# Altium PCB KUOZHAN.PCBDOC (part 3 of 21)
Units mm, origin at the board's own origin, x right, y up, seen from the top; angles counter-clockwise.
Board outline 165.51 x 116.38 mm, 2 copper layers (Top Layer, Bottom Layer); 171 components, 245 nets, 894 pads, 298 vias.
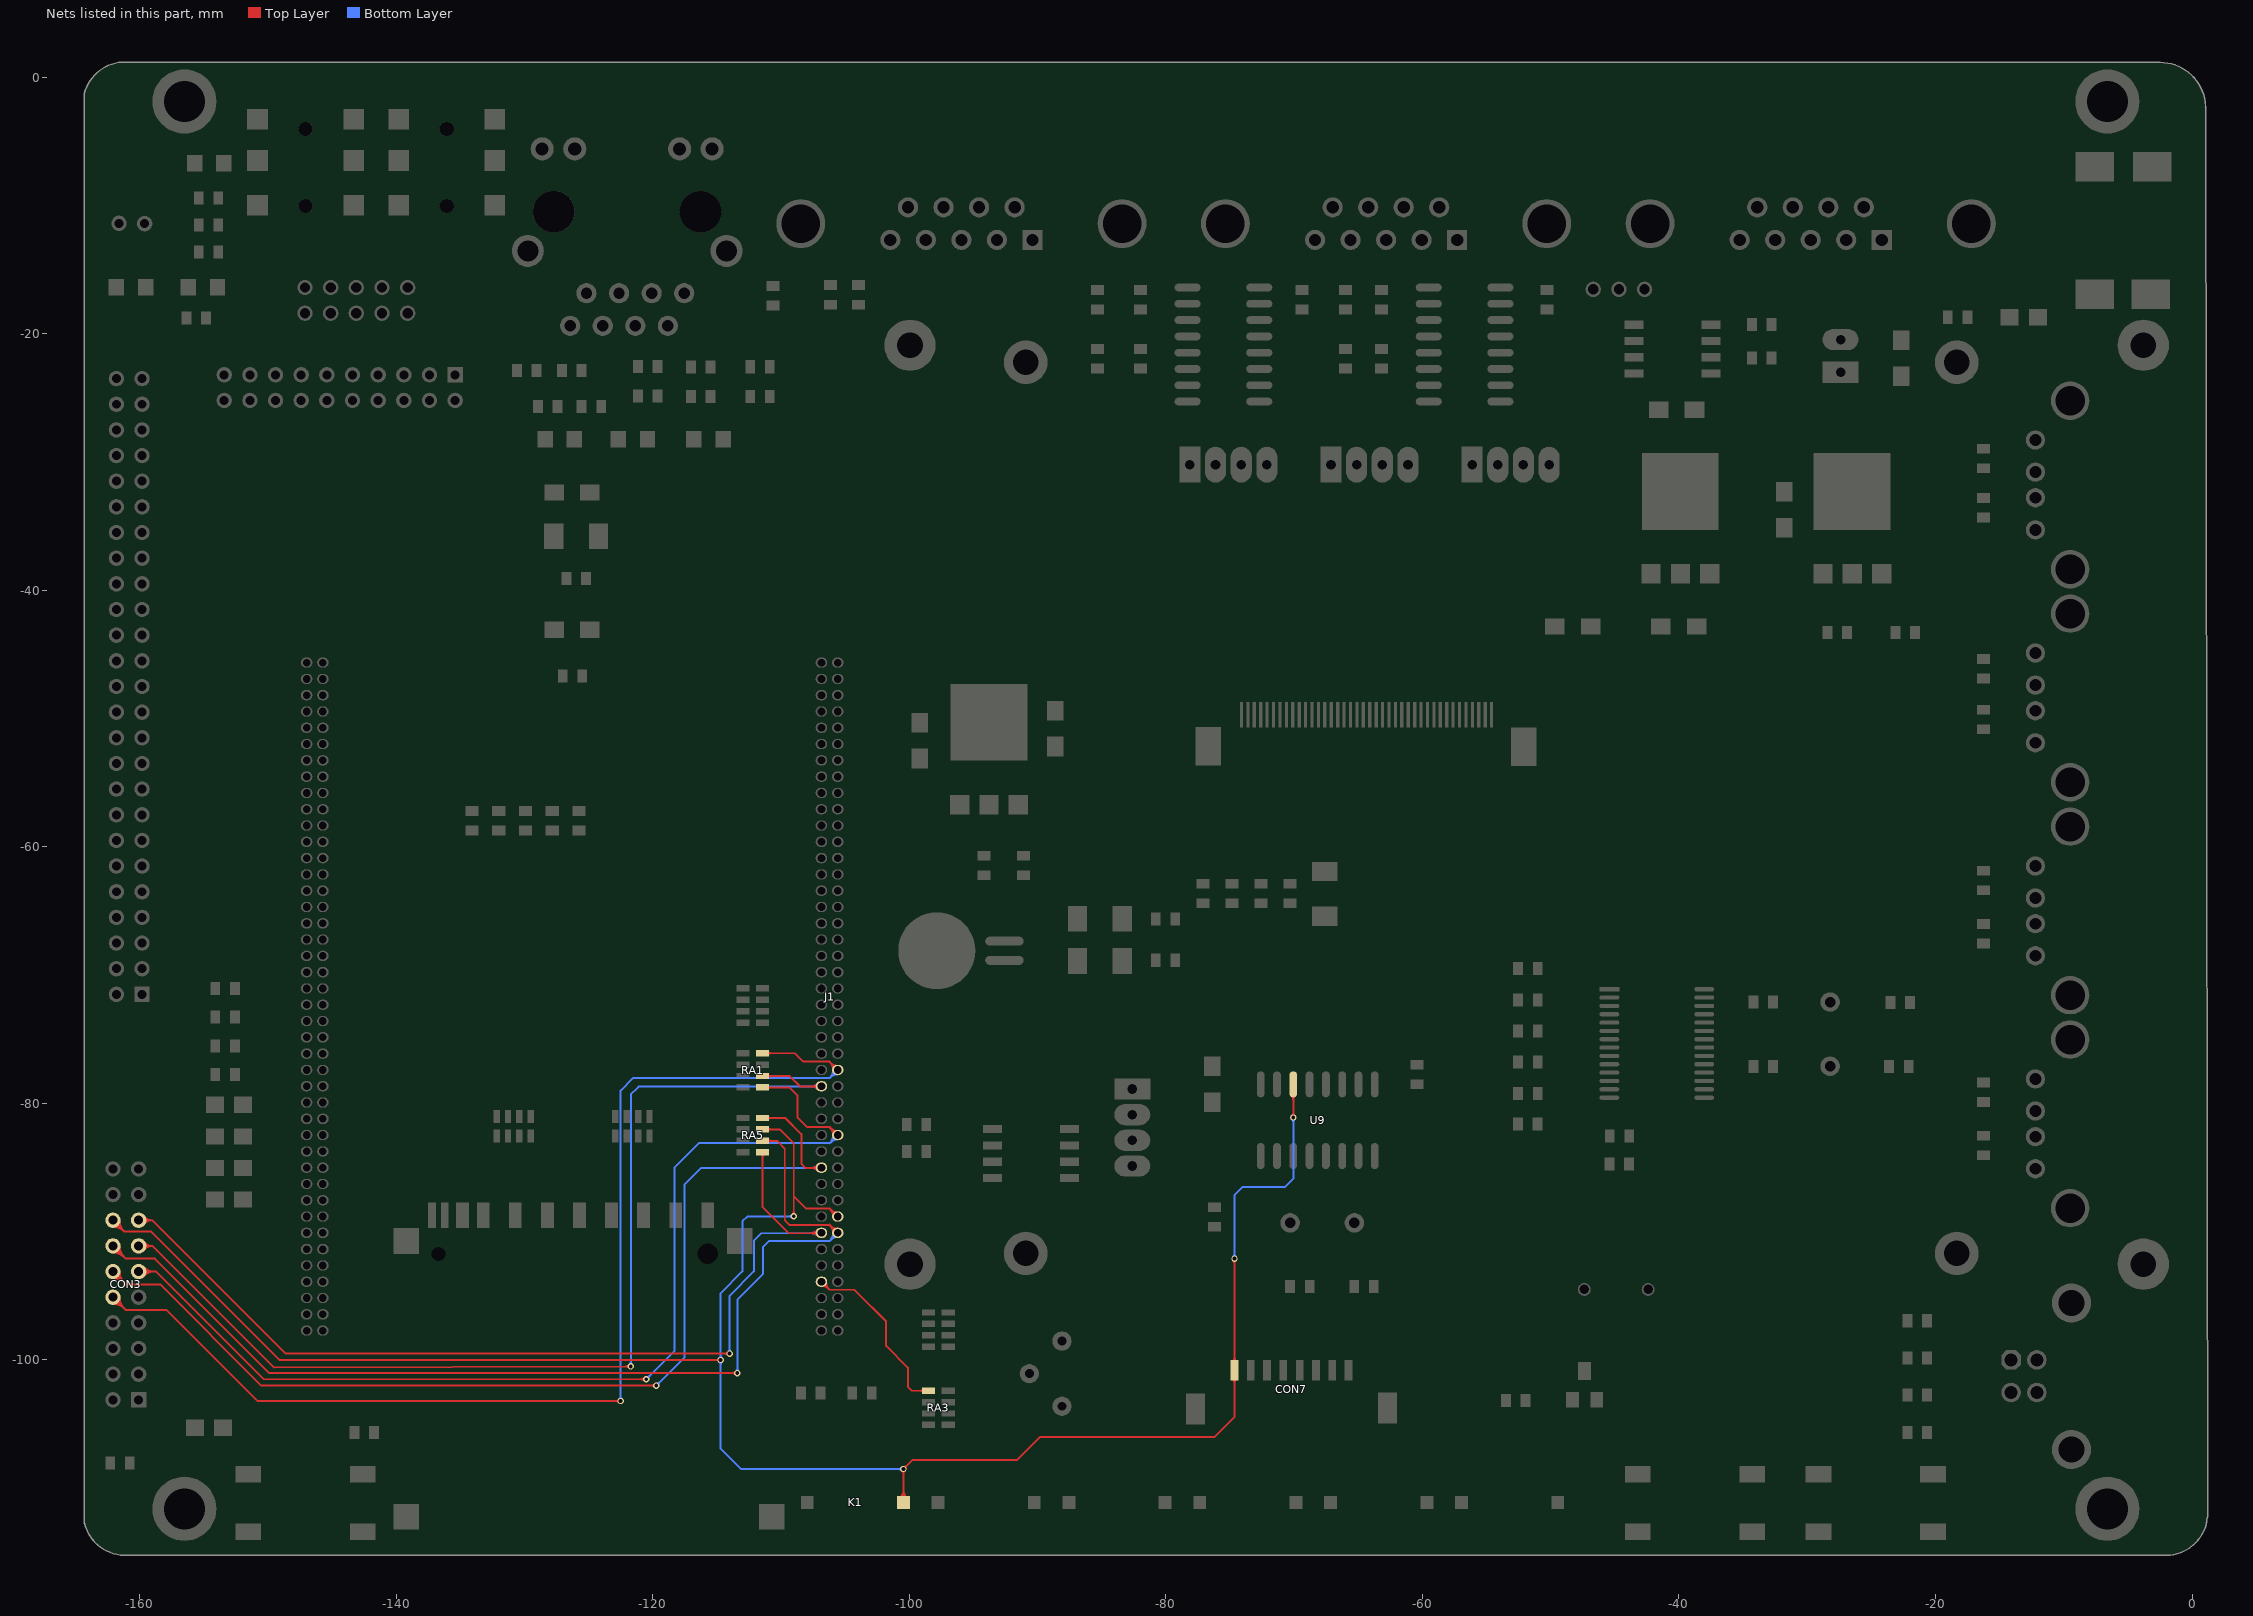
[diagram p3: the nets of this part, all layers, seen from the top]

## Via types
v1: diameter 0.5, hole 0.3, Top Layer to Bottom Layer, 272 vias
v2: diameter 0.6, hole 0.3, Top Layer to Bottom Layer, 24 vias
v3: diameter 0.9, hole 0.9, Top Layer to Bottom Layer, 2 vias

## Nets (pads, with @x,y where several pads share a name; then routed paths per layer and width w, separated by ;. In a path a pad name is that pad's centre, name@x,y a point inside that pad or via, vN(x,y) a via of type N, cw(c..) or ccw(c..) an arc to the next point about the centre after c; other vN are vias at no path point) (continued)
EINT1: CON3.10 J1.52 RA1.4 | length 143.6
  Top Layer w0.15: CON3.10@-162.067,-95.106 -161.074,-96.1 -157.9,-96.1 -150.8,-103.2 v1(-122.5,-103.2) ; v1@-122.588,-103.288 ccw(c-122.802,-103.502) -122.802,-103.2 ccw(c-122.802,-102.898) v1@-122.588,-103.112 ; RA1.4@-111.42,-76.087 -108.913,-76.087 -108.3,-76.7 -108.256,-76.744 -106.216,-76.744 J1.52@-105.571,-77.389 ; -106.196,-76.785 J1.52@-105.571,-77.41 ; CON3.10@-162.067,-95.631 cw(c-162.067,-96.899) -161.171,-96.003 ; CON3.10@-162.067,-95.631 cw(c-162.067,-96.899) -161.171,-96.003 ; CON3.10@-162.067,-95.631 cw(c-162.067,-96.899) -161.171,-96.003 ; CON3.10@-162.067,-95.631 cw(c-162.067,-96.899) -161.171,-96.003 ; CON3.10@-162.067,-95.631 cw(c-162.067,-96.899) -161.171,-96.003 ; CON3.10@-162.067,-95.481 cw(c-162.067,-96.387) -161.427,-95.747 ; CON3.10@-162.067,-95.481 cw(c-162.067,-96.387) -161.427,-95.747 ; CON3.10@-162.067,-95.481 cw(c-162.067,-96.387) -161.427,-95.747 ; CON3.10@-162.067,-95.481 cw(c-162.067,-96.387) -161.427,-95.747 ; CON3.10@-162.067,-95.481 cw(c-162.067,-96.387) -161.427,-95.747 ; CON3.10@-161.692,-95.106 ccw(c-160.787,-95.106) -161.427,-95.747 ; CON3.10@-161.692,-95.106 ccw(c-160.787,-95.106) -161.427,-95.747 ; CON3.10@-161.692,-95.106 ccw(c-160.787,-95.106) -161.427,-95.747 ; CON3.10@-161.692,-95.106 ccw(c-160.787,-95.106) -161.427,-95.747 ; CON3.10@-161.692,-95.106 ccw(c-160.787,-95.106) -161.427,-95.747 ; CON3.10@-161.542,-95.106 ccw(c-160.275,-95.106) -161.171,-96.003 ; CON3.10@-161.542,-95.106 ccw(c-160.275,-95.106) -161.171,-96.003 ; CON3.10@-161.542,-95.106 ccw(c-160.275,-95.106) -161.171,-96.003 ; CON3.10@-161.542,-95.106 ccw(c-160.275,-95.106) -161.171,-96.003 ; CON3.10@-161.542,-95.106 ccw(c-160.275,-95.106) -161.171,-96.003 ; -122.922,-103.2 cw(c-122.922,-103.622) v1@-122.624,-103.324 ; -122.922,-103.2 ccw(c-122.922,-102.778) v1@-122.624,-103.076 ; -122.922,-103.2 cw(c-122.922,-103.622) v1@-122.624,-103.324 ; -122.922,-103.2 ccw(c-122.922,-102.778) v1@-122.624,-103.076 ; -122.922,-103.2 cw(c-122.922,-103.622) v1@-122.624,-103.324 ; -122.922,-103.2 ccw(c-122.922,-102.778) v1@-122.624,-103.076 ; -122.922,-103.2 ccw(c-122.922,-102.778) v1@-122.624,-103.076 ; -122.922,-103.2 cw(c-122.922,-103.622) v1@-122.624,-103.324 ; RA1.4@-111.038,-76.211 cw(c-110.739,-76.509) -110.739,-76.087 ; RA1.4@-111.038,-76.211 cw(c-110.739,-76.509) -110.739,-76.087 ; RA1.4@-111.038,-76.211 cw(c-110.739,-76.509) -110.739,-76.087 ; RA1.4@-111.038,-76.211 cw(c-110.739,-76.509) -110.739,-76.087 ; RA1.4@-111.038,-76.211 cw(c-110.739,-76.509) -110.739,-76.087 ; RA1.4@-111.038,-75.963 ccw(c-110.739,-75.664) -110.739,-76.087 ; RA1.4@-111.038,-75.963 ccw(c-110.739,-75.664) -110.739,-76.087 ; RA1.4@-111.038,-75.963 ccw(c-110.739,-75.664) -110.739,-76.087 ; RA1.4@-111.038,-75.963 ccw(c-110.739,-75.664) -110.739,-76.087 ; RA1.4@-111.038,-75.963 ccw(c-110.739,-75.664) -110.739,-76.087 ; -106.126,-76.856 cw(c-106.68,-77.41) J1.52@-105.896,-77.41 ; -106.126,-76.856 ccw(c-105.571,-76.301) J1.52@-105.571,-77.085 ; -106.126,-76.856 cw(c-106.68,-77.41) J1.52@-105.896,-77.41 ; -106.126,-76.856 ccw(c-105.571,-76.301) J1.52@-105.571,-77.085 ; -106.126,-76.856 cw(c-106.68,-77.41) J1.52@-105.896,-77.41 ; -106.126,-76.856 ccw(c-105.571,-76.301) J1.52@-105.571,-77.085 ; J1.52@-105.946,-77.389 ccw(c-106.851,-77.389) -106.211,-76.749 cw(c-106.851,-77.389) J1.52@-105.946,-77.389 ; J1.52@-105.946,-77.389 ccw(c-106.8,-77.389) -106.196,-76.785 cw(c-106.8,-77.389) J1.52@-105.946,-77.389 ; J1.52@-105.87,-77.112 cw(c-106.168,-77.41) J1.52@-105.746,-77.41 ; J1.52@-105.87,-77.112 ccw(c-105.571,-76.813) J1.52@-105.571,-77.235 ; J1.52@-105.87,-77.112 cw(c-106.168,-77.41) J1.52@-105.746,-77.41 ; J1.52@-105.87,-77.112 ccw(c-105.571,-76.813) J1.52@-105.571,-77.235 ; J1.52@-105.87,-77.112 cw(c-106.168,-77.41) J1.52@-105.746,-77.41 ; J1.52@-105.87,-77.112 ccw(c-105.571,-76.813) J1.52@-105.571,-77.235 ; J1.52@-105.796,-77.389 ccw(c-106.339,-77.389) -105.955,-77.005 cw(c-106.339,-77.389) J1.52@-105.796,-77.389 ; J1.52@-105.796,-77.389 ccw(c-106.288,-77.389) -105.94,-77.041 cw(c-106.288,-77.389) J1.52@-105.796,-77.389 ; J1.52@-105.621,-77.064 cw(c-105.621,-76.4) -106.09,-76.87 ccw(c-105.621,-76.4) J1.52@-105.621,-77.064 ; J1.52@-105.621,-77.064 cw(c-105.621,-76.35) -106.126,-76.855 ccw(c-105.621,-76.35) J1.52@-105.621,-77.064
  Bottom Layer w0.15: v1@-122.588,-103.112 ccw(c-122.802,-102.898) -122.5,-102.898 ccw(c-122.198,-102.898) v1@-122.412,-103.112 ; v1(-122.5,-103.2) -122.5,-79 -121.535,-78.035 ; -121.514,-78.014 -106.196,-78.014 J1.52@-105.571,-77.389 ; -106.196,-78.035 J1.52@-105.571,-77.41 ; v1@-122.624,-103.076 ccw(c-122.922,-102.778) -122.5,-102.778 ; v1@-122.624,-103.076 ccw(c-122.922,-102.778) -122.5,-102.778 ; v1@-122.624,-103.076 ccw(c-122.922,-102.778) -122.5,-102.778 ; v1@-122.624,-103.076 ccw(c-122.922,-102.778) -122.5,-102.778 ; -122.5,-102.778 ccw(c-122.078,-102.778) v1@-122.376,-103.076 ; -122.5,-102.778 ccw(c-122.078,-102.778) v1@-122.376,-103.076 ; -122.5,-102.778 ccw(c-122.078,-102.778) v1@-122.376,-103.076 ; -122.5,-102.778 ccw(c-122.078,-102.778) v1@-122.376,-103.076 ; -106.126,-77.965 cw(c-105.571,-78.52) J1.52@-105.571,-77.735 ; -106.126,-77.965 ccw(c-106.68,-77.41) J1.52@-105.896,-77.41 ; -106.126,-77.965 cw(c-105.571,-78.52) J1.52@-105.571,-77.735 ; -106.126,-77.965 ccw(c-106.68,-77.41) J1.52@-105.896,-77.41 ; -106.126,-77.965 cw(c-105.571,-78.52) J1.52@-105.571,-77.735 ; -106.126,-77.965 ccw(c-106.68,-77.41) J1.52@-105.896,-77.41 ; -105.87,-77.709 cw(c-105.571,-78.008) J1.52@-105.571,-77.585 ; -105.87,-77.709 ccw(c-106.168,-77.41) J1.52@-105.746,-77.41 ; -105.87,-77.709 cw(c-105.571,-78.008) J1.52@-105.571,-77.585 ; -105.87,-77.709 ccw(c-106.168,-77.41) J1.52@-105.746,-77.41 ; -105.87,-77.709 cw(c-105.571,-78.008) J1.52@-105.571,-77.585 ; -105.87,-77.709 ccw(c-106.168,-77.41) J1.52@-105.746,-77.41 ; J1.52@-105.621,-77.714 ccw(c-105.621,-78.327) -106.054,-77.894 cw(c-105.621,-78.327) J1.52@-105.621,-77.714 ; J1.52@-105.621,-77.714 ccw(c-105.621,-78.378) -106.09,-77.909 cw(c-105.621,-78.378) J1.52@-105.621,-77.714 ; -106.171,-77.989 ccw(c-106.717,-77.443) -105.945,-77.405 cw(c-106.717,-77.443) -106.171,-77.989 ; -106.16,-78 ccw(c-106.686,-77.474) -105.945,-77.415 cw(c-106.686,-77.474) -106.16,-78 ; -105.931,-77.75 ccw(c-106.261,-77.421) -105.796,-77.398 cw(c-106.261,-77.421) -105.931,-77.75 ; -105.93,-77.77 ccw(c-106.26,-77.44) -105.795,-77.403 cw(c-106.26,-77.44) -105.93,-77.77
EINT2: CON3.11 J1.60 RA1.1 | length 133.6
  Top Layer w0.15: CON3.11@-160.067,-93.106 -158.694,-93.106 -150.3,-101.5 v1(-120.5,-101.5) ; v1@-120.588,-101.588 ccw(c-120.802,-101.802) -120.802,-101.5 ccw(c-120.802,-101.198) v1@-120.588,-101.412 ; RA1.1@-111.42,-78.754 -109.346,-78.754 -108.7,-79.4 -108.7,-81.1 -108,-81.8 -107.976,-81.824 -106.216,-81.824 J1.60@-105.571,-82.469 ; -106.217,-81.848 J1.60@-105.571,-82.494 ; CON3.11@-159.802,-93.372 cw(c-159.162,-94.012) -159.162,-93.106 ; CON3.11@-159.802,-93.372 cw(c-159.162,-94.012) -159.162,-93.106 ; CON3.11@-159.802,-93.372 cw(c-159.162,-94.012) -159.162,-93.106 ; CON3.11@-159.802,-93.372 cw(c-159.162,-94.012) -159.162,-93.106 ; CON3.11@-159.802,-93.372 cw(c-159.162,-94.012) -159.162,-93.106 ; CON3.11@-159.802,-92.841 ccw(c-159.162,-92.201) -159.162,-93.106 ; CON3.11@-159.802,-92.841 ccw(c-159.162,-92.201) -159.162,-93.106 ; CON3.11@-159.802,-92.841 ccw(c-159.162,-92.201) -159.162,-93.106 ; CON3.11@-159.802,-92.841 ccw(c-159.162,-92.201) -159.162,-93.106 ; CON3.11@-159.802,-92.841 ccw(c-159.162,-92.201) -159.162,-93.106 ; CON3.11@-159.696,-93.478 cw(c-158.8,-94.374) -158.8,-93.106 ; CON3.11@-159.696,-93.478 cw(c-158.8,-94.374) -158.8,-93.106 ; CON3.11@-159.696,-93.478 cw(c-158.8,-94.374) -158.8,-93.106 ; CON3.11@-159.696,-93.478 cw(c-158.8,-94.374) -158.8,-93.106 ; CON3.11@-159.696,-93.478 cw(c-158.8,-94.374) -158.8,-93.106 ; CON3.11@-159.696,-92.735 ccw(c-158.8,-91.839) -158.8,-93.106 ; CON3.11@-159.696,-92.735 ccw(c-158.8,-91.839) -158.8,-93.106 ; CON3.11@-159.696,-92.735 ccw(c-158.8,-91.839) -158.8,-93.106 ; CON3.11@-159.696,-92.735 ccw(c-158.8,-91.839) -158.8,-93.106 ; CON3.11@-159.696,-92.735 ccw(c-158.8,-91.839) -158.8,-93.106 ; -120.922,-101.5 cw(c-120.922,-101.922) v1@-120.624,-101.624 ; -120.922,-101.5 ccw(c-120.922,-101.078) v1@-120.624,-101.376 ; -120.922,-101.5 cw(c-120.922,-101.922) v1@-120.624,-101.624 ; -120.922,-101.5 ccw(c-120.922,-101.078) v1@-120.624,-101.376 ; -120.922,-101.5 cw(c-120.922,-101.922) v1@-120.624,-101.624 ; -120.922,-101.5 ccw(c-120.922,-101.078) v1@-120.624,-101.376 ; -120.922,-101.5 ccw(c-120.922,-101.078) v1@-120.624,-101.376 ; -120.922,-101.5 cw(c-120.922,-101.922) v1@-120.624,-101.624 ; RA1.1@-111.038,-78.878 cw(c-110.739,-79.176) -110.739,-78.754 ; RA1.1@-111.038,-78.878 cw(c-110.739,-79.176) -110.739,-78.754 ; RA1.1@-111.038,-78.878 cw(c-110.739,-79.176) -110.739,-78.754 ; RA1.1@-111.038,-78.878 cw(c-110.739,-79.176) -110.739,-78.754 ; RA1.1@-111.038,-78.878 cw(c-110.739,-79.176) -110.739,-78.754 ; RA1.1@-111.038,-78.63 ccw(c-110.739,-78.331) -110.739,-78.754 ; RA1.1@-111.038,-78.63 ccw(c-110.739,-78.331) -110.739,-78.754 ; RA1.1@-111.038,-78.63 ccw(c-110.739,-78.331) -110.739,-78.754 ; RA1.1@-111.038,-78.63 ccw(c-110.739,-78.331) -110.739,-78.754 ; RA1.1@-111.038,-78.63 ccw(c-110.739,-78.331) -110.739,-78.754 ; -106.126,-81.939 cw(c-106.68,-82.494) J1.60@-105.896,-82.494 ; -106.126,-81.939 ccw(c-105.571,-81.384) J1.60@-105.571,-82.169 ; -106.126,-81.939 cw(c-106.68,-82.494) J1.60@-105.896,-82.494 ; -106.126,-81.939 ccw(c-105.571,-81.384) J1.60@-105.571,-82.169 ; -106.126,-81.939 cw(c-106.68,-82.494) J1.60@-105.896,-82.494 ; -106.126,-81.939 ccw(c-105.571,-81.384) J1.60@-105.571,-82.169 ; J1.60@-105.946,-82.469 ccw(c-106.851,-82.469) -106.211,-81.829 cw(c-106.851,-82.469) J1.60@-105.946,-82.469 ; J1.60@-105.946,-82.469 ccw(c-106.792,-82.469) -106.194,-81.871 cw(c-106.792,-82.469) J1.60@-105.946,-82.469 ; J1.60@-105.87,-82.195 cw(c-106.168,-82.494) J1.60@-105.746,-82.494 ; J1.60@-105.87,-82.195 ccw(c-105.571,-81.896) J1.60@-105.571,-82.319 ; J1.60@-105.87,-82.195 cw(c-106.168,-82.494) J1.60@-105.746,-82.494 ; J1.60@-105.87,-82.195 ccw(c-105.571,-81.896) J1.60@-105.571,-82.319 ; J1.60@-105.87,-82.195 cw(c-106.168,-82.494) J1.60@-105.746,-82.494 ; J1.60@-105.87,-82.195 ccw(c-105.571,-81.896) J1.60@-105.571,-82.319 ; J1.60@-105.796,-82.469 ccw(c-106.339,-82.469) -105.955,-82.085 cw(c-106.339,-82.469) J1.60@-105.796,-82.469 ; J1.60@-105.796,-82.469 ccw(c-106.28,-82.469) -105.938,-82.127 cw(c-106.28,-82.469) J1.60@-105.796,-82.469 ; J1.60@-105.621,-82.144 cw(c-105.621,-81.48) -106.09,-81.95 ccw(c-105.621,-81.48) J1.60@-105.621,-82.144 ; J1.60@-105.621,-82.144 cw(c-105.621,-81.421) -106.132,-81.933 ccw(c-105.621,-81.421) J1.60@-105.621,-82.144
  Bottom Layer w0.15: v1(-120.5,-101.5) -118.3,-99.3 -118.3,-85 -116.4,-83.1 -106.201,-83.1 J1.60@-105.571,-82.469 ; v1@-120.5,-101.375 ccw(c-120.5,-101.073) -120.287,-101.287 ccw(c-120.073,-101.5) v1@-120.375,-101.5 ; -106.196,-83.119 J1.60@-105.571,-82.494 ; -106.176,-83.075 ccw(c-106.736,-82.516) J1.60@-105.946,-82.483 ; -106.09,-82.989 cw(c-105.621,-83.458) J1.60@-105.621,-82.794 ; -105.935,-82.833 ccw(c-106.272,-82.496) J1.60@-105.796,-82.477 ; v1@-120.5,-101.325 ccw(c-120.5,-100.903) -120.201,-101.201 ; v1@-120.5,-101.325 ccw(c-120.5,-100.903) -120.201,-101.201 ; v1@-120.5,-101.325 ccw(c-120.5,-100.903) -120.201,-101.201 ; v1@-120.5,-101.325 ccw(c-120.5,-100.903) -120.201,-101.201 ; v1@-120.325,-101.5 cw(c-119.903,-101.5) -120.201,-101.201 ; v1@-120.325,-101.5 cw(c-119.903,-101.5) -120.201,-101.201 ; v1@-120.325,-101.5 cw(c-119.903,-101.5) -120.201,-101.201 ; v1@-120.325,-101.5 cw(c-119.903,-101.5) -120.201,-101.201 ; -106.126,-83.049 cw(c-105.571,-83.604) J1.60@-105.571,-82.819 ; -106.126,-83.049 ccw(c-106.68,-82.494) J1.60@-105.896,-82.494 ; -106.126,-83.049 cw(c-105.571,-83.604) J1.60@-105.571,-82.819 ; -106.126,-83.049 ccw(c-106.68,-82.494) J1.60@-105.896,-82.494 ; -106.126,-83.049 cw(c-105.571,-83.604) J1.60@-105.571,-82.819 ; -106.126,-83.049 ccw(c-106.68,-82.494) J1.60@-105.896,-82.494 ; -105.87,-82.793 cw(c-105.571,-83.091) J1.60@-105.571,-82.669 ; -105.87,-82.793 ccw(c-106.168,-82.494) J1.60@-105.746,-82.494 ; -105.87,-82.793 cw(c-105.571,-83.091) J1.60@-105.571,-82.669 ; -105.87,-82.793 ccw(c-106.168,-82.494) J1.60@-105.746,-82.494 ; -105.87,-82.793 cw(c-105.571,-83.091) J1.60@-105.571,-82.669 ; -105.87,-82.793 ccw(c-106.168,-82.494) J1.60@-105.746,-82.494 ; J1.60@-105.621,-82.794 ccw(c-105.621,-83.399) -106.048,-82.971 cw(c-105.621,-83.399) J1.60@-105.621,-82.794 ; -106.158,-83.082 ccw(c-106.681,-82.559) -105.945,-82.497 cw(c-106.681,-82.559) -106.158,-83.082 ; -105.93,-82.853 ccw(c-106.26,-82.523) -105.795,-82.484 cw(c-106.26,-82.523) -105.93,-82.853
EINT3: CON3.12 J1.63 RA5.4 | length 125.9
  Top Layer w0.15: CON3.12@-162.067,-93.106 -161.074,-94.1 -158.4,-94.1 -150.5,-102 v1(-119.718,-102) ; v1@-119.806,-102.088 ccw(c-120.02,-102.302) -120.02,-102 ccw(c-120.02,-101.698) v1@-119.806,-101.912 ; RA5.4@-111.42,-81.137 -109.663,-81.137 -108.4,-82.4 -108.4,-84.7 -108.064,-85.036 J1.63@-106.841,-85.036 ; CON3.12@-162.067,-93.631 cw(c-162.067,-94.899) -161.171,-94.003 ; CON3.12@-162.067,-93.631 cw(c-162.067,-94.899) -161.171,-94.003 ; CON3.12@-162.067,-93.631 cw(c-162.067,-94.899) -161.171,-94.003 ; CON3.12@-162.067,-93.631 cw(c-162.067,-94.899) -161.171,-94.003 ; CON3.12@-162.067,-93.631 cw(c-162.067,-94.899) -161.171,-94.003 ; CON3.12@-162.067,-93.481 cw(c-162.067,-94.387) -161.427,-93.747 ; CON3.12@-162.067,-93.481 cw(c-162.067,-94.387) -161.427,-93.747 ; CON3.12@-162.067,-93.481 cw(c-162.067,-94.387) -161.427,-93.747 ; CON3.12@-162.067,-93.481 cw(c-162.067,-94.387) -161.427,-93.747 ; CON3.12@-162.067,-93.481 cw(c-162.067,-94.387) -161.427,-93.747 ; CON3.12@-161.692,-93.106 ccw(c-160.787,-93.106) -161.427,-93.747 ; CON3.12@-161.692,-93.106 ccw(c-160.787,-93.106) -161.427,-93.747 ; CON3.12@-161.692,-93.106 ccw(c-160.787,-93.106) -161.427,-93.747 ; CON3.12@-161.692,-93.106 ccw(c-160.787,-93.106) -161.427,-93.747 ; CON3.12@-161.692,-93.106 ccw(c-160.787,-93.106) -161.427,-93.747 ; CON3.12@-161.542,-93.106 ccw(c-160.275,-93.106) -161.171,-94.003 ; CON3.12@-161.542,-93.106 ccw(c-160.275,-93.106) -161.171,-94.003 ; CON3.12@-161.542,-93.106 ccw(c-160.275,-93.106) -161.171,-94.003 ; CON3.12@-161.542,-93.106 ccw(c-160.275,-93.106) -161.171,-94.003 ; CON3.12@-161.542,-93.106 ccw(c-160.275,-93.106) -161.171,-94.003 ; -120.141,-102 cw(c-120.141,-102.422) v1@-119.842,-102.124 ; -120.141,-102 ccw(c-120.141,-101.578) v1@-119.842,-101.876 ; -120.141,-102 cw(c-120.141,-102.422) v1@-119.842,-102.124 ; -120.141,-102 ccw(c-120.141,-101.578) v1@-119.842,-101.876 ; -120.141,-102 cw(c-120.141,-102.422) v1@-119.842,-102.124 ; -120.141,-102 ccw(c-120.141,-101.578) v1@-119.842,-101.876 ; -120.141,-102 ccw(c-120.141,-101.578) v1@-119.842,-101.876 ; -120.141,-102 cw(c-120.141,-102.422) v1@-119.842,-102.124 ; RA5.4@-111.038,-81.261 cw(c-110.739,-81.559) -110.739,-81.137 ; RA5.4@-111.038,-81.261 cw(c-110.739,-81.559) -110.739,-81.137 ; RA5.4@-111.038,-81.261 cw(c-110.739,-81.559) -110.739,-81.137 ; RA5.4@-111.038,-81.261 cw(c-110.739,-81.559) -110.739,-81.137 ; RA5.4@-111.038,-81.261 cw(c-110.739,-81.559) -110.739,-81.137 ; RA5.4@-111.038,-81.013 ccw(c-110.739,-80.714) -110.739,-81.137 ; RA5.4@-111.038,-81.013 ccw(c-110.739,-80.714) -110.739,-81.137 ; RA5.4@-111.038,-81.013 ccw(c-110.739,-80.714) -110.739,-81.137 ; RA5.4@-111.038,-81.013 ccw(c-110.739,-80.714) -110.739,-81.137 ; RA5.4@-111.038,-81.013 ccw(c-110.739,-80.714) -110.739,-81.137 ; -107.625,-85.036 cw(c-107.625,-85.82) J1.63@-107.071,-85.265 ; -107.625,-85.036 ccw(c-107.625,-84.251) J1.63@-107.071,-84.806 ; -107.625,-85.036 cw(c-107.625,-85.82) J1.63@-107.071,-85.265 ; -107.625,-85.036 ccw(c-107.625,-84.251) J1.63@-107.071,-84.806 ; -107.625,-85.036 cw(c-107.625,-85.82) J1.63@-107.071,-85.265 ; -107.625,-85.036 ccw(c-107.625,-84.251) J1.63@-107.071,-84.806 ; J1.63@-107.263,-85.036 cw(c-107.263,-85.458) J1.63@-106.965,-85.159 ; J1.63@-107.263,-85.036 ccw(c-107.263,-84.613) J1.63@-106.965,-84.912 ; J1.63@-107.263,-85.036 cw(c-107.263,-85.458) J1.63@-106.965,-85.159 ; J1.63@-107.263,-85.036 ccw(c-107.263,-84.613) J1.63@-106.965,-84.912 ; J1.63@-107.263,-85.036 cw(c-107.263,-85.458) J1.63@-106.965,-85.159 ; J1.63@-107.263,-85.036 ccw(c-107.263,-84.613) J1.63@-106.965,-84.912 ; -107.739,-85.036 ccw(c-107.739,-84.161) -107.121,-84.78 cw(c-107.739,-84.161) -107.739,-85.036 ; -107.612,-85.036 cw(c-107.612,-85.73) -107.121,-85.239 ccw(c-107.612,-85.73) -107.612,-85.036 ; -107.377,-85.036 ccw(c-107.377,-84.523) -107.015,-84.886 cw(c-107.377,-84.523) -107.377,-85.036
  Bottom Layer w0.15: v1(-119.718,-102) -117.5,-99.782 -117.5,-86.3 -116.236,-85.036 -112.736,-85.036 J1.63@-106.841,-85.036 ; v1@-119.718,-101.875 ccw(c-119.718,-101.573) -119.505,-101.787 ccw(c-119.291,-102) v1@-119.593,-102 ; v1@-119.718,-101.825 ccw(c-119.718,-101.403) -119.419,-101.701 ; v1@-119.718,-101.825 ccw(c-119.718,-101.403) -119.419,-101.701 ; v1@-119.718,-101.825 ccw(c-119.718,-101.403) -119.419,-101.701 ; v1@-119.718,-101.825 ccw(c-119.718,-101.403) -119.419,-101.701 ; v1@-119.543,-102 cw(c-119.121,-102) -119.419,-101.701 ; v1@-119.543,-102 cw(c-119.121,-102) -119.419,-101.701 ; v1@-119.543,-102 cw(c-119.121,-102) -119.419,-101.701 ; v1@-119.543,-102 cw(c-119.121,-102) -119.419,-101.701 ; -107.625,-85.036 cw(c-107.625,-85.82) J1.63@-107.071,-85.265 ; -107.625,-85.036 ccw(c-107.625,-84.251) J1.63@-107.071,-84.806 ; -107.625,-85.036 cw(c-107.625,-85.82) J1.63@-107.071,-85.265 ; -107.625,-85.036 ccw(c-107.625,-84.251) J1.63@-107.071,-84.806 ; -107.625,-85.036 cw(c-107.625,-85.82) J1.63@-107.071,-85.265 ; -107.625,-85.036 ccw(c-107.625,-84.251) J1.63@-107.071,-84.806 ; J1.63@-107.263,-85.036 cw(c-107.263,-85.458) J1.63@-106.965,-85.159 ; J1.63@-107.263,-85.036 ccw(c-107.263,-84.613) J1.63@-106.965,-84.912 ; J1.63@-107.263,-85.036 cw(c-107.263,-85.458) J1.63@-106.965,-85.159 ; J1.63@-107.263,-85.036 ccw(c-107.263,-84.613) J1.63@-106.965,-84.912 ; J1.63@-107.263,-85.036 cw(c-107.263,-85.458) J1.63@-106.965,-85.159 ; J1.63@-107.263,-85.036 ccw(c-107.263,-84.613) J1.63@-106.965,-84.912 ; -107.739,-85.036 ccw(c-107.739,-84.161) -107.121,-84.78 cw(c-107.739,-84.161) -107.739,-85.036 ; -107.612,-85.036 cw(c-107.612,-85.73) -107.121,-85.239 ccw(c-107.612,-85.73) -107.612,-85.036 ; -107.377,-85.036 ccw(c-107.377,-84.523) -107.015,-84.886 cw(c-107.377,-84.523) -107.377,-85.036
EINT4: CON3.13 J1.53 RA1.2 | length 124
  Top Layer w0.15: CON3.13@-160.067,-91.106 -158.994,-91.106 -149.5,-100.6 v1(-121.7,-100.501) ; v1@-121.788,-100.589 ccw(c-122.001,-100.804) -122.002,-100.502 ccw(c-122.003,-100.2) v1@-121.789,-100.413 ; RA1.2@-111.42,-77.865 -109.316,-77.865 -108.5,-78.681 J1.53@-106.841,-78.681 ; CON3.13@-159.771,-91.337 cw(c-159.3,-91.703) -159.3,-91.106 ; CON3.13@-159.771,-91.337 cw(c-159.3,-91.703) -159.3,-91.106 ; CON3.13@-159.771,-91.337 cw(c-159.3,-91.703) -159.3,-91.106 ; CON3.13@-159.771,-91.337 cw(c-159.3,-91.703) -159.3,-91.106 ; CON3.13@-159.771,-91.337 cw(c-159.3,-91.703) -159.3,-91.106 ; CON3.13@-159.771,-90.876 ccw(c-159.3,-90.51) -159.3,-91.106 ; CON3.13@-159.771,-90.876 ccw(c-159.3,-90.51) -159.3,-91.106 ; CON3.13@-159.771,-90.876 ccw(c-159.3,-90.51) -159.3,-91.106 ; CON3.13@-159.771,-90.876 ccw(c-159.3,-90.51) -159.3,-91.106 ; CON3.13@-159.771,-90.876 ccw(c-159.3,-90.51) -159.3,-91.106 ; CON3.13@-159.653,-91.429 cw(c-158.994,-91.942) -158.994,-91.106 ; CON3.13@-159.653,-91.429 cw(c-158.994,-91.942) -158.994,-91.106 ; CON3.13@-159.653,-91.429 cw(c-158.994,-91.942) -158.994,-91.106 ; CON3.13@-159.653,-91.429 cw(c-158.994,-91.942) -158.994,-91.106 ; CON3.13@-159.653,-91.429 cw(c-158.994,-91.942) -158.994,-91.106 ; CON3.13@-159.653,-90.784 ccw(c-158.994,-90.271) -158.994,-91.106 ; CON3.13@-159.653,-90.784 ccw(c-158.994,-90.271) -158.994,-91.106 ; CON3.13@-159.653,-90.784 ccw(c-158.994,-90.271) -158.994,-91.106 ; CON3.13@-159.653,-90.784 ccw(c-158.994,-90.271) -158.994,-91.106 ; CON3.13@-159.653,-90.784 ccw(c-158.994,-90.271) -158.994,-91.106 ; -122.123,-100.502 cw(c-122.121,-100.925) v1@-121.823,-100.625 ; -122.122,-100.502 ccw(c-122.124,-100.08) v1@-121.824,-100.377 ; -122.123,-100.502 cw(c-122.121,-100.925) v1@-121.823,-100.625 ; -122.122,-100.502 ccw(c-122.124,-100.08) v1@-121.824,-100.377 ; -122.123,-100.502 cw(c-122.121,-100.925) v1@-121.823,-100.625 ; -122.122,-100.502 ccw(c-122.124,-100.08) v1@-121.824,-100.377 ; -122.122,-100.502 ccw(c-122.124,-100.08) v1@-121.824,-100.377 ; -122.123,-100.502 cw(c-122.121,-100.925) v1@-121.823,-100.625 ; RA1.2@-111.038,-77.989 cw(c-110.739,-78.287) -110.739,-77.865 ; RA1.2@-111.038,-77.989 cw(c-110.739,-78.287) -110.739,-77.865 ; RA1.2@-111.038,-77.989 cw(c-110.739,-78.287) -110.739,-77.865 ; RA1.2@-111.038,-77.989 cw(c-110.739,-78.287) -110.739,-77.865 ; RA1.2@-111.038,-77.989 cw(c-110.739,-78.287) -110.739,-77.865 ; RA1.2@-111.038,-77.741 ccw(c-110.739,-77.442) -110.739,-77.865 ; RA1.2@-111.038,-77.741 ccw(c-110.739,-77.442) -110.739,-77.865 ; RA1.2@-111.038,-77.741 ccw(c-110.739,-77.442) -110.739,-77.865 ; RA1.2@-111.038,-77.741 ccw(c-110.739,-77.442) -110.739,-77.865 ; RA1.2@-111.038,-77.741 ccw(c-110.739,-77.442) -110.739,-77.865 ; -107.625,-78.681 cw(c-107.625,-79.466) J1.53@-107.071,-78.911 ; -107.625,-78.681 ccw(c-107.625,-77.897) J1.53@-107.071,-78.451 ; -107.625,-78.681 cw(c-107.625,-79.466) J1.53@-107.071,-78.911 ; -107.625,-78.681 ccw(c-107.625,-77.897) J1.53@-107.071,-78.451 ; -107.625,-78.681 cw(c-107.625,-79.466) J1.53@-107.071,-78.911 ; -107.625,-78.681 ccw(c-107.625,-77.897) J1.53@-107.071,-78.451 ; J1.53@-107.263,-78.681 cw(c-107.263,-79.104) J1.53@-106.965,-78.805 ; J1.53@-107.263,-78.681 ccw(c-107.263,-78.259) J1.53@-106.965,-78.557 ; J1.53@-107.263,-78.681 cw(c-107.263,-79.104) J1.53@-106.965,-78.805 ; J1.53@-107.263,-78.681 ccw(c-107.263,-78.259) J1.53@-106.965,-78.557 ; J1.53@-107.263,-78.681 cw(c-107.263,-79.104) J1.53@-106.965,-78.805 ; J1.53@-107.263,-78.681 ccw(c-107.263,-78.259) J1.53@-106.965,-78.557 ; -107.728,-78.681 ccw(c-107.728,-77.822) -107.121,-78.43 cw(c-107.728,-77.822) -107.728,-78.681 ; -107.623,-78.681 cw(c-107.623,-79.391) -107.121,-78.889 ccw(c-107.623,-79.391) -107.623,-78.681 ; -107.366,-78.681 ccw(c-107.366,-78.184) -107.015,-78.536 cw(c-107.366,-78.184) -107.366,-78.681
  Bottom Layer w0.15: v1@-121.788,-100.412 ccw(c-122.002,-100.199) -121.7,-100.199 ccw(c-121.398,-100.199) v1@-121.612,-100.412 ; v1(-121.7,-100.501) -121.7,-79.3 -121.2,-78.8 -121.081,-78.681 J1.53@-106.841,-78.681 ; v1@-121.824,-100.377 ccw(c-122.122,-100.078) -121.7,-100.078 ; v1@-121.824,-100.377 ccw(c-122.122,-100.078) -121.7,-100.078 ; v1@-121.824,-100.377 ccw(c-122.122,-100.078) -121.7,-100.078 ; v1@-121.824,-100.377 ccw(c-122.122,-100.078) -121.7,-100.078 ; -121.7,-100.078 ccw(c-121.278,-100.078) v1@-121.576,-100.377 ; -121.7,-100.078 ccw(c-121.278,-100.078) v1@-121.576,-100.377 ; -121.7,-100.078 ccw(c-121.278,-100.078) v1@-121.576,-100.377 ; -121.7,-100.078 ccw(c-121.278,-100.078) v1@-121.576,-100.377 ; -107.625,-78.681 cw(c-107.625,-79.466) J1.53@-107.071,-78.911 ; -107.625,-78.681 ccw(c-107.625,-77.897) J1.53@-107.071,-78.451 ; -107.625,-78.681 cw(c-107.625,-79.466) J1.53@-107.071,-78.911 ; -107.625,-78.681 ccw(c-107.625,-77.897) J1.53@-107.071,-78.451 ; -107.625,-78.681 cw(c-107.625,-79.466) J1.53@-107.071,-78.911 ; -107.625,-78.681 ccw(c-107.625,-77.897) J1.53@-107.071,-78.451 ; J1.53@-107.263,-78.681 cw(c-107.263,-79.104) J1.53@-106.965,-78.805 ; J1.53@-107.263,-78.681 ccw(c-107.263,-78.259) J1.53@-106.965,-78.557 ; J1.53@-107.263,-78.681 cw(c-107.263,-79.104) J1.53@-106.965,-78.805 ; J1.53@-107.263,-78.681 ccw(c-107.263,-78.259) J1.53@-106.965,-78.557 ; J1.53@-107.263,-78.681 cw(c-107.263,-79.104) J1.53@-106.965,-78.805 ; J1.53@-107.263,-78.681 ccw(c-107.263,-78.259) J1.53@-106.965,-78.557 ; -107.728,-78.681 ccw(c-107.728,-77.822) -107.121,-78.43 cw(c-107.728,-77.822) -107.728,-78.681 ; -107.623,-78.681 cw(c-107.623,-79.391) -107.121,-78.889 ccw(c-107.623,-79.391) -107.623,-78.681 ; -107.366,-78.681 ccw(c-107.366,-78.184) -107.015,-78.536 cw(c-107.366,-78.184) -107.366,-78.681
EINT5: CON3.14 J1.72 RA5.2 | length 126.6
  Top Layer w0.15: CON3.14@-162.067,-91.106 -161.074,-92.1 -158.8,-92.1 -149.875,-101.025 v1(-113.4,-101.025) ; v1@-113.488,-101.113 ccw(c-113.702,-101.327) -113.702,-101.025 ccw(c-113.702,-100.723) v1@-113.488,-100.937 ; RA5.2@-111.42,-82.915 -110.304,-82.915 -109.7,-83.519 -109.7,-89.1 -109.38,-89.42 -109.336,-89.464 -106.196,-89.464 J1.72@-105.571,-90.089 ; -106.196,-89.494 J1.72@-105.571,-90.119 ; CON3.14@-162.067,-91.631 cw(c-162.067,-92.899) -161.171,-92.003 ; CON3.14@-162.067,-91.631 cw(c-162.067,-92.899) -161.171,-92.003 ; CON3.14@-162.067,-91.631 cw(c-162.067,-92.899) -161.171,-92.003 ; CON3.14@-162.067,-91.631 cw(c-162.067,-92.899) -161.171,-92.003 ; CON3.14@-162.067,-91.631 cw(c-162.067,-92.899) -161.171,-92.003 ; CON3.14@-162.067,-91.481 cw(c-162.067,-92.387) -161.427,-91.747 ; CON3.14@-162.067,-91.481 cw(c-162.067,-92.387) -161.427,-91.747 ; CON3.14@-162.067,-91.481 cw(c-162.067,-92.387) -161.427,-91.747 ; CON3.14@-162.067,-91.481 cw(c-162.067,-92.387) -161.427,-91.747 ; CON3.14@-162.067,-91.481 cw(c-162.067,-92.387) -161.427,-91.747 ; CON3.14@-161.692,-91.106 ccw(c-160.787,-91.106) -161.427,-91.747 ; CON3.14@-161.692,-91.106 ccw(c-160.787,-91.106) -161.427,-91.747 ; CON3.14@-161.692,-91.106 ccw(c-160.787,-91.106) -161.427,-91.747 ; CON3.14@-161.692,-91.106 ccw(c-160.787,-91.106) -161.427,-91.747 ; CON3.14@-161.692,-91.106 ccw(c-160.787,-91.106) -161.427,-91.747 ; CON3.14@-161.542,-91.106 ccw(c-160.275,-91.106) -161.171,-92.003 ; CON3.14@-161.542,-91.106 ccw(c-160.275,-91.106) -161.171,-92.003 ; CON3.14@-161.542,-91.106 ccw(c-160.275,-91.106) -161.171,-92.003 ; CON3.14@-161.542,-91.106 ccw(c-160.275,-91.106) -161.171,-92.003 ; CON3.14@-161.542,-91.106 ccw(c-160.275,-91.106) -161.171,-92.003 ; -113.822,-101.025 cw(c-113.822,-101.447) v1@-113.524,-101.149 ; -113.822,-101.025 ccw(c-113.822,-100.603) v1@-113.524,-100.901 ; -113.822,-101.025 cw(c-113.822,-101.447) v1@-113.524,-101.149 ; -113.822,-101.025 ccw(c-113.822,-100.603) v1@-113.524,-100.901 ; -113.822,-101.025 cw(c-113.822,-101.447) v1@-113.524,-101.149 ; -113.822,-101.025 ccw(c-113.822,-100.603) v1@-113.524,-100.901 ; -113.822,-101.025 ccw(c-113.822,-100.603) v1@-113.524,-100.901 ; -113.822,-101.025 cw(c-113.822,-101.447) v1@-113.524,-101.149 ; RA5.2@-111.038,-83.039 cw(c-110.739,-83.337) -110.739,-82.915 ; RA5.2@-111.038,-83.039 cw(c-110.739,-83.337) -110.739,-82.915 ; RA5.2@-111.038,-83.039 cw(c-110.739,-83.337) -110.739,-82.915 ; RA5.2@-111.038,-83.039 cw(c-110.739,-83.337) -110.739,-82.915 ; RA5.2@-111.038,-83.039 cw(c-110.739,-83.337) -110.739,-82.915 ; RA5.2@-111.038,-82.791 ccw(c-110.739,-82.492) -110.739,-82.915 ; RA5.2@-111.038,-82.791 ccw(c-110.739,-82.492) -110.739,-82.915 ; RA5.2@-111.038,-82.791 ccw(c-110.739,-82.492) -110.739,-82.915 ; RA5.2@-111.038,-82.791 ccw(c-110.739,-82.492) -110.739,-82.915 ; RA5.2@-111.038,-82.791 ccw(c-110.739,-82.492) -110.739,-82.915 ; -106.126,-89.564 cw(c-106.68,-90.119) J1.72@-105.896,-90.119 ; -106.126,-89.564 ccw(c-105.571,-89.01) J1.72@-105.571,-89.794 ; -106.126,-89.564 cw(c-106.68,-90.119) J1.72@-105.896,-90.119 ; -106.126,-89.564 ccw(c-105.571,-89.01) J1.72@-105.571,-89.794 ; -106.126,-89.564 cw(c-106.68,-90.119) J1.72@-105.896,-90.119 ; -106.126,-89.564 ccw(c-105.571,-89.01) J1.72@-105.571,-89.794 ; J1.72@-105.946,-90.089 ccw(c-106.851,-90.089) -106.211,-89.449 cw(c-106.851,-90.089) J1.72@-105.946,-90.089 ; J1.72@-105.946,-90.089 ccw(c-106.779,-90.089) -106.19,-89.5 cw(c-106.779,-90.089) J1.72@-105.946,-90.089 ; J1.72@-105.87,-89.82 cw(c-106.168,-90.119) J1.72@-105.746,-90.119 ; J1.72@-105.87,-89.82 ccw(c-105.571,-89.522) J1.72@-105.571,-89.944 ; J1.72@-105.87,-89.82 cw(c-106.168,-90.119) J1.72@-105.746,-90.119 ; J1.72@-105.87,-89.82 ccw(c-105.571,-89.522) J1.72@-105.571,-89.944 ; J1.72@-105.87,-89.82 cw(c-106.168,-90.119) J1.72@-105.746,-90.119 ; J1.72@-105.87,-89.82 ccw(c-105.571,-89.522) J1.72@-105.571,-89.944 ; J1.72@-105.796,-90.089 ccw(c-106.339,-90.089) -105.955,-89.705 cw(c-106.339,-90.089) J1.72@-105.796,-90.089 ; J1.72@-105.796,-90.089 ccw(c-106.267,-90.089) -105.934,-89.756 cw(c-106.267,-90.089) J1.72@-105.796,-90.089 ; J1.72@-105.621,-89.764 cw(c-105.621,-89.1) -106.09,-89.57 ccw(c-105.621,-89.1) J1.72@-105.621,-89.764 ; J1.72@-105.621,-89.764 cw(c-105.621,-89.028) -106.141,-89.549 ccw(c-105.621,-89.028) J1.72@-105.621,-89.764
  Bottom Layer w0.15: v1@-113.488,-100.937 ccw(c-113.702,-100.723) -113.4,-100.723 ccw(c-113.098,-100.723) v1@-113.312,-100.937 ; v1(-113.4,-101.025) -113.4,-95.3 -111.4,-93.3 -111.4,-91.2 -110.944,-90.744 ; -110.914,-90.714 -106.196,-90.714 J1.72@-105.571,-90.089 ; v1@-113.524,-100.901 ccw(c-113.822,-100.603) -113.4,-100.603 ; v1@-113.524,-100.901 ccw(c-113.822,-100.603) -113.4,-100.603 ; v1@-113.524,-100.901 ccw(c-113.822,-100.603) -113.4,-100.603 ; v1@-113.524,-100.901 ccw(c-113.822,-100.603) -113.4,-100.603 ; -113.4,-100.603 ccw(c-112.978,-100.603) v1@-113.276,-100.901 ; -113.4,-100.603 ccw(c-112.978,-100.603) v1@-113.276,-100.901 ; -113.4,-100.603 ccw(c-112.978,-100.603) v1@-113.276,-100.901 ; -113.4,-100.603 ccw(c-112.978,-100.603) v1@-113.276,-100.901 ; -105.87,-90.418 cw(c-105.571,-90.717) J1.72@-105.571,-90.294 ; -105.87,-90.418 ccw(c-106.168,-90.119) J1.72@-105.746,-90.119 ; -105.87,-90.418 cw(c-105.571,-90.717) J1.72@-105.571,-90.294 ; -105.87,-90.418 ccw(c-106.168,-90.119) J1.72@-105.746,-90.119 ; -105.87,-90.418 cw(c-105.571,-90.717) J1.72@-105.571,-90.294 ; -105.87,-90.418 ccw(c-106.168,-90.119) J1.72@-105.746,-90.119 ; -106.171,-90.689 ccw(c-106.717,-90.143) -105.945,-90.105 cw(c-106.717,-90.143) -106.171,-90.689 ; -106.09,-90.609 cw(c-105.621,-91.078) -105.621,-90.414 ccw(c-105.621,-91.078) -106.09,-90.609 ; -105.931,-90.45 ccw(c-106.261,-90.121) -105.796,-90.098 cw(c-106.261,-90.121) -105.931,-90.45
EINT6: CON3.15 J1.71 RA5.1 | length 115.7
  Top Layer w0.15: CON3.15@-160.067,-89.106 -158.994,-89.106 ; v1@-114.088,-99.588 ccw(c-114.302,-99.802) -114.302,-99.5 ccw(c-114.302,-99.198) v1@-114.088,-99.412 ; v1(-114,-99.5) -148.6,-99.5 -158.994,-89.106 ; RA5.1@-111.42,-83.804 -111.42,-88.08 -109.381,-90.119 J1.71@-106.841,-90.119 ; CON3.15@-159.771,-89.337 cw(c-159.3,-89.703) -159.3,-89.106 ; CON3.15@-159.771,-89.337 cw(c-159.3,-89.703) -159.3,-89.106 ; CON3.15@-159.771,-89.337 cw(c-159.3,-89.703) -159.3,-89.106 ; CON3.15@-159.771,-89.337 cw(c-159.3,-89.703) -159.3,-89.106 ; CON3.15@-159.771,-89.337 cw(c-159.3,-89.703) -159.3,-89.106 ; CON3.15@-159.771,-88.876 ccw(c-159.3,-88.51) -159.3,-89.106 ; CON3.15@-159.771,-88.876 ccw(c-159.3,-88.51) -159.3,-89.106 ; CON3.15@-159.771,-88.876 ccw(c-159.3,-88.51) -159.3,-89.106 ; CON3.15@-159.771,-88.876 ccw(c-159.3,-88.51) -159.3,-89.106 ; CON3.15@-159.771,-88.876 ccw(c-159.3,-88.51) -159.3,-89.106 ; CON3.15@-159.653,-89.429 cw(c-158.994,-89.942) -158.994,-89.106 ; CON3.15@-159.653,-89.429 cw(c-158.994,-89.942) -158.994,-89.106 ; CON3.15@-159.653,-89.429 cw(c-158.994,-89.942) -158.994,-89.106 ; CON3.15@-159.653,-89.429 cw(c-158.994,-89.942) -158.994,-89.106 ; CON3.15@-159.653,-89.429 cw(c-158.994,-89.942) -158.994,-89.106 ; CON3.15@-159.653,-88.784 ccw(c-158.994,-88.271) -158.994,-89.106 ; CON3.15@-159.653,-88.784 ccw(c-158.994,-88.271) -158.994,-89.106 ; CON3.15@-159.653,-88.784 ccw(c-158.994,-88.271) -158.994,-89.106 ; CON3.15@-159.653,-88.784 ccw(c-158.994,-88.271) -158.994,-89.106 ; CON3.15@-159.653,-88.784 ccw(c-158.994,-88.271) -158.994,-89.106 ; -114.422,-99.5 cw(c-114.422,-99.922) v1@-114.124,-99.624 ; -114.422,-99.5 ccw(c-114.422,-99.078) v1@-114.124,-99.376 ; -114.422,-99.5 cw(c-114.422,-99.922) v1@-114.124,-99.624 ; -114.422,-99.5 ccw(c-114.422,-99.078) v1@-114.124,-99.376 ; -114.422,-99.5 cw(c-114.422,-99.922) v1@-114.124,-99.624 ; -114.422,-99.5 ccw(c-114.422,-99.078) v1@-114.124,-99.376 ; -114.422,-99.5 ccw(c-114.422,-99.078) v1@-114.124,-99.376 ; -114.422,-99.5 cw(c-114.422,-99.922) v1@-114.124,-99.624 ; RA5.1@-111.543,-83.928 cw(c-111.842,-84.226) -111.42,-84.226 ; RA5.1@-111.543,-83.928 cw(c-111.842,-84.226) -111.42,-84.226 ; RA5.1@-111.543,-83.928 cw(c-111.842,-84.226) -111.42,-84.226 ; RA5.1@-111.543,-83.928 cw(c-111.842,-84.226) -111.42,-84.226 ; RA5.1@-111.543,-83.928 cw(c-111.842,-84.226) -111.42,-84.226 ; -111.42,-84.226 cw(c-110.997,-84.226) RA5.1@-111.296,-83.928 ; -111.42,-84.226 cw(c-110.997,-84.226) RA5.1@-111.296,-83.928 ; -111.42,-84.226 cw(c-110.997,-84.226) RA5.1@-111.296,-83.928 ; -111.42,-84.226 cw(c-110.997,-84.226) RA5.1@-111.296,-83.928 ; -111.42,-84.226 cw(c-110.997,-84.226) RA5.1@-111.296,-83.928 ; -107.625,-90.119 cw(c-107.625,-90.904) J1.71@-107.071,-90.349 ; -107.625,-90.119 ccw(c-107.625,-89.335) J1.71@-107.071,-89.889 ; -107.625,-90.119 cw(c-107.625,-90.904) J1.71@-107.071,-90.349 ; -107.625,-90.119 ccw(c-107.625,-89.335) J1.71@-107.071,-89.889 ; -107.625,-90.119 cw(c-107.625,-90.904) J1.71@-107.071,-90.349 ; -107.625,-90.119 ccw(c-107.625,-89.335) J1.71@-107.071,-89.889 ; J1.71@-107.263,-90.119 cw(c-107.263,-90.542) J1.71@-106.965,-90.243 ; J1.71@-107.263,-90.119 ccw(c-107.263,-89.697) J1.71@-106.965,-89.995 ; J1.71@-107.263,-90.119 cw(c-107.263,-90.542) J1.71@-106.965,-90.243 ; J1.71@-107.263,-90.119 ccw(c-107.263,-89.697) J1.71@-106.965,-89.995 ; J1.71@-107.263,-90.119 cw(c-107.263,-90.542) J1.71@-106.965,-90.243 ; J1.71@-107.263,-90.119 ccw(c-107.263,-89.697) J1.71@-106.965,-89.995 ; -107.747,-90.119 ccw(c-107.747,-89.233) -107.121,-89.859 cw(c-107.747,-89.233) -107.747,-90.119 ; -107.603,-90.119 cw(c-107.603,-90.802) -107.121,-90.319 ccw(c-107.603,-90.802) -107.603,-90.119 ; -107.385,-90.119 ccw(c-107.385,-89.595) -107.015,-89.966 cw(c-107.385,-89.595) -107.385,-90.119
  Bottom Layer w0.15: v1@-114.088,-99.412 ccw(c-114.302,-99.198) -114,-99.198 ccw(c-113.698,-99.198) v1@-113.912,-99.412 ; v1(-114,-99.5) -114,-95 -112.1,-93.1 -112.1,-90.7 -111.519,-90.119 J1.71@-106.841,-90.119 ; v1@-114.124,-99.376 ccw(c-114.422,-99.078) -114,-99.078 ; v1@-114.124,-99.376 ccw(c-114.422,-99.078) -114,-99.078 ; v1@-114.124,-99.376 ccw(c-114.422,-99.078) -114,-99.078 ; v1@-114.124,-99.376 ccw(c-114.422,-99.078) -114,-99.078 ; -114,-99.078 ccw(c-113.578,-99.078) v1@-113.876,-99.376 ; -114,-99.078 ccw(c-113.578,-99.078) v1@-113.876,-99.376 ; -114,-99.078 ccw(c-113.578,-99.078) v1@-113.876,-99.376 ; -114,-99.078 ccw(c-113.578,-99.078) v1@-113.876,-99.376 ; -107.625,-90.119 cw(c-107.625,-90.904) J1.71@-107.071,-90.349 ; -107.625,-90.119 ccw(c-107.625,-89.335) J1.71@-107.071,-89.889 ; -107.625,-90.119 cw(c-107.625,-90.904) J1.71@-107.071,-90.349 ; -107.625,-90.119 ccw(c-107.625,-89.335) J1.71@-107.071,-89.889 ; -107.625,-90.119 cw(c-107.625,-90.904) J1.71@-107.071,-90.349 ; -107.625,-90.119 ccw(c-107.625,-89.335) J1.71@-107.071,-89.889 ; J1.71@-107.263,-90.119 cw(c-107.263,-90.542) J1.71@-106.965,-90.243 ; J1.71@-107.263,-90.119 ccw(c-107.263,-89.697) J1.71@-106.965,-89.995 ; J1.71@-107.263,-90.119 cw(c-107.263,-90.542) J1.71@-106.965,-90.243 ; J1.71@-107.263,-90.119 ccw(c-107.263,-89.697) J1.71@-106.965,-89.995 ; J1.71@-107.263,-90.119 cw(c-107.263,-90.542) J1.71@-106.965,-90.243 ; J1.71@-107.263,-90.119 ccw(c-107.263,-89.697) J1.71@-106.965,-89.995 ; -107.747,-90.119 ccw(c-107.747,-89.233) -107.121,-89.859 cw(c-107.747,-89.233) -107.747,-90.119 ; -107.603,-90.119 cw(c-107.603,-90.802) -107.121,-90.319 ccw(c-107.603,-90.802) -107.603,-90.119 ; -107.385,-90.119 ccw(c-107.385,-89.595) -107.015,-89.966 cw(c-107.385,-89.595) -107.385,-90.119
EINT8: CON3.16 CON7.1 J1.70 K1.1 RA5.3 U9.14 | length 220.8
  Top Layer w0.15: CON3.16@-162.067,-89.106 -161.174,-90 ; v1@-114.788,-100.088 ccw(c-115.002,-100.302) -115.002,-100 ccw(c-115.002,-99.698) v1@-114.788,-99.912 ; v1(-114.7,-100) -149.1,-100 -159.1,-90 -161.174,-90 ; RA5.3@-111.42,-82.026 -110.074,-82.026 -109,-83.1 -109,-87.223 ; v1@-109.088,-88.712 ccw(c-109.302,-88.498) -109,-88.498 ccw(c-108.698,-88.498) v1@-108.912,-88.712 ; v1(-109,-88.8) -109,-87.223 ; -106.196,-88.223 J1.70@-105.571,-88.848 ; J1.70@-105.571,-88.819 -106.196,-88.194 -108.029,-88.194 -109,-87.223 ; K1.1@-100.751,-110.799 ccw(c-101.476,-110.074) -100.45,-110.074 ccw(c-99.424,-110.074) K1.1@-100.149,-110.799 ; K1.1@-100.644,-110.906 ccw(c-101.114,-110.436) -100.45,-110.436 ccw(c-99.786,-110.436) K1.1@-100.256,-110.906 ; v1@-100.574,-108.624 cw(c-100.872,-108.922) -100.45,-108.922 cw(c-100.028,-108.922) v1@-100.326,-108.624 ; K1.1@-100.45,-111.1 v1(-100.45,-108.5) -99.75,-107.8 -91.6,-107.8 -89.8,-106 -76.2,-106 -74.645,-104.445 v1(-74.645,-92.1) ; v1@-100.45,-108.325 ccw(c-100.45,-107.903) -100.151,-108.201 ccw(c-99.853,-108.5) v1@-100.275,-108.5 ; CON7.1@-74.804,-101.447 cw(c-75.188,-101.831) -74.645,-101.831 cw(c-74.102,-101.831) CON7.1@-74.486,-101.447 ; CON7.1@-74.804,-100.128 ccw(c-75.188,-99.744) -74.645,-99.744 ccw(c-74.102,-99.744) CON7.1@-74.486,-100.128 ; v1@-74.769,-92.224 cw(c-75.067,-92.522) -74.645,-92.522 cw(c-74.223,-92.522) v1@-74.521,-92.224 ; U9.14@-70.222,-79.386 cw(c-70.615,-79.778) -70.06,-79.778 cw(c-69.505,-79.778) U9.14@-69.898,-79.386 ; v1@-70.184,-80.976 ccw(c-70.482,-80.678) -70.06,-80.678 ccw(c-69.638,-80.678) v1@-69.936,-80.976 ; v1(-70.06,-81.1) U9.14@-70.06,-78.512 ; CON3.16@-162.066,-89.631 cw(c-162.064,-90.89) -161.174,-90 ; CON3.16@-162.066,-89.631 cw(c-162.064,-90.89) -161.174,-90 ; CON3.16@-162.066,-89.631 cw(c-162.064,-90.89) -161.174,-90 ; CON3.16@-162.066,-89.631 cw(c-162.064,-90.89) -161.174,-90 ; CON3.16@-162.066,-89.631 cw(c-162.064,-90.89) -161.174,-90 ; CON3.16@-162.067,-89.481 cw(c-162.065,-90.38) -161.429,-89.745 ; CON3.16@-162.067,-89.481 cw(c-162.065,-90.38) -161.429,-89.745 ; CON3.16@-162.067,-89.481 cw(c-162.065,-90.38) -161.429,-89.745 ; CON3.16@-162.067,-89.481 cw(c-162.065,-90.38) -161.429,-89.745 ; CON3.16@-162.067,-89.481 cw(c-162.065,-90.38) -161.429,-89.745 ; CON3.16@-161.692,-89.107 ccw(c-160.794,-89.109) -161.429,-89.745 ; CON3.16@-161.692,-89.107 ccw(c-160.794,-89.109) -161.429,-89.745 ; CON3.16@-161.692,-89.107 ccw(c-160.794,-89.109) -161.429,-89.745 ; CON3.16@-161.692,-89.107 ccw(c-160.794,-89.109) -161.429,-89.745 ; CON3.16@-161.692,-89.107 ccw(c-160.794,-89.109) -161.429,-89.745 ; CON3.16@-161.542,-89.108 ccw(c-160.284,-89.11) -161.174,-90 ; CON3.16@-161.542,-89.108 ccw(c-160.284,-89.11) -161.174,-90 ; CON3.16@-161.542,-89.108 ccw(c-160.284,-89.11) -161.174,-90 ; CON3.16@-161.542,-89.108 ccw(c-160.284,-89.11) -161.174,-90 ; CON3.16@-161.542,-89.108 ccw(c-160.284,-89.11) -161.174,-90 ; -115.122,-100 cw(c-115.122,-100.422) v1@-114.824,-100.124 ; -115.122,-100 ccw(c-115.122,-99.578) v1@-114.824,-99.876 ; -115.122,-100 cw(c-115.122,-100.422) v1@-114.824,-100.124 ; -115.122,-100 ccw(c-115.122,-99.578) v1@-114.824,-99.876 ; -115.122,-100 cw(c-115.122,-100.422) v1@-114.824,-100.124 ; -115.122,-100 ccw(c-115.122,-99.578) v1@-114.824,-99.876 ; -115.122,-100 ccw(c-115.122,-99.578) v1@-114.824,-99.876 ; -115.122,-100 cw(c-115.122,-100.422) v1@-114.824,-100.124 ; RA5.3@-111.038,-82.15 cw(c-110.739,-82.448) -110.739,-82.026 ; RA5.3@-111.038,-82.15 cw(c-110.739,-82.448) -110.739,-82.026 ; RA5.3@-111.038,-82.15 cw(c-110.739,-82.448) -110.739,-82.026 ; RA5.3@-111.038,-82.15 cw(c-110.739,-82.448) -110.739,-82.026 ; RA5.3@-111.038,-82.15 cw(c-110.739,-82.448) -110.739,-82.026 ; RA5.3@-111.038,-81.902 ccw(c-110.739,-81.603) -110.739,-82.026 ; RA5.3@-111.038,-81.902 ccw(c-110.739,-81.603) -110.739,-82.026 ; RA5.3@-111.038,-81.902 ccw(c-110.739,-81.603) -110.739,-82.026 ; RA5.3@-111.038,-81.902 ccw(c-110.739,-81.603) -110.739,-82.026 ; RA5.3@-111.038,-81.902 ccw(c-110.739,-81.603) -110.739,-82.026 ; v1@-109.124,-88.676 ccw(c-109.422,-88.378) -109,-88.378 ; v1@-109.124,-88.676 ccw(c-109.422,-88.378) -109,-88.378 ; v1@-109.124,-88.676 ccw(c-109.422,-88.378) -109,-88.378 ; v1@-109.124,-88.676 ccw(c-109.422,-88.378) -109,-88.378 ; -109,-88.378 ccw(c-108.578,-88.378) v1@-108.876,-88.676 ; -109,-88.378 ccw(c-108.578,-88.378) v1@-108.876,-88.676 ; -109,-88.378 ccw(c-108.578,-88.378) v1@-108.876,-88.676 ; -109,-88.378 ccw(c-108.578,-88.378) v1@-108.876,-88.676 ; -106.126,-88.293 cw(c-106.68,-88.848) J1.70@-105.896,-88.848 ; -106.126,-88.293 ccw(c-105.571,-87.739) J1.70@-105.571,-88.523 ; -106.126,-88.293 cw(c-106.68,-88.848) J1.70@-105.896,-88.848 ; -106.126,-88.293 ccw(c-105.571,-87.739) J1.70@-105.571,-88.523 ; -106.126,-88.293 cw(c-106.68,-88.848) J1.70@-105.896,-88.848 ; -106.126,-88.293 ccw(c-105.571,-87.739) J1.70@-105.571,-88.523 ; J1.70@-105.946,-88.819 ccw(c-106.851,-88.819) -106.211,-88.179 cw(c-106.851,-88.819) J1.70@-105.946,-88.819 ; J1.70@-105.946,-88.819 ccw(c-106.781,-88.819) -106.19,-88.229 cw(c-106.781,-88.819) J1.70@-105.946,-88.819 ; J1.70@-105.87,-88.55 cw(c-106.168,-88.848) J1.70@-105.746,-88.848 ; J1.70@-105.87,-88.55 ccw(c-105.571,-88.251) J1.70@-105.571,-88.673 ; J1.70@-105.87,-88.55 cw(c-106.168,-88.848) J1.70@-105.746,-88.848 ; J1.70@-105.87,-88.55 ccw(c-105.571,-88.251) J1.70@-105.571,-88.673 ; J1.70@-105.87,-88.55 cw(c-106.168,-88.848) J1.70@-105.746,-88.848 ; J1.70@-105.87,-88.55 ccw(c-105.571,-88.251) J1.70@-105.571,-88.673 ; J1.70@-105.796,-88.819 ccw(c-106.339,-88.819) -105.955,-88.435 cw(c-106.339,-88.819) J1.70@-105.796,-88.819 ; J1.70@-105.796,-88.819 ccw(c-106.269,-88.819) -105.934,-88.485 cw(c-106.269,-88.819) J1.70@-105.796,-88.819 ; J1.70@-105.621,-88.494 cw(c-105.621,-87.83) -106.09,-88.3 ccw(c-105.621,-87.83) J1.70@-105.621,-88.494 ; J1.70@-105.621,-88.494 cw(c-105.621,-87.76) -106.14,-88.279 ccw(c-105.621,-87.76) J1.70@-105.621,-88.494
  Bottom Layer w0.15: v1@-114.788,-100.088 cw(c-115.002,-100.302) -114.7,-100.302 cw(c-114.398,-100.302) v1@-114.612,-100.088 ; v1@-114.788,-99.912 ccw(c-115.002,-99.698) -114.7,-99.698 ccw(c-114.398,-99.698) v1@-114.612,-99.912 ; v1@-109.088,-88.888 ccw(c-109.302,-89.102) -109.302,-88.8 ccw(c-109.302,-88.498) v1@-109.088,-88.712 ; v1(-109,-88.8) -112.6,-88.8 -113,-89.2 -113,-93.1 -114.7,-94.8 v1(-114.7,-100) -114.7,-106.9 -113.1,-108.5 v1(-100.45,-108.5) ; v1@-100.574,-108.624 ccw(c-100.872,-108.922) -100.872,-108.5 ccw(c-100.872,-108.078) v1@-100.574,-108.376 ; v1@-74.769,-91.976 ccw(c-75.067,-91.678) -74.645,-91.678 ccw(c-74.223,-91.678) v1@-74.521,-91.976 ; v1(-74.645,-92.1) -74.645,-87.145 -74,-86.5 -70.7,-86.5 -70.06,-85.86 v1(-70.06,-81.1) ; v1@-70.184,-81.224 cw(c-70.482,-81.522) -70.06,-81.522 cw(c-69.638,-81.522) v1@-69.936,-81.224 ; v1@-114.824,-100.124 cw(c-115.122,-100.422) -114.7,-100.422 ; v1@-114.824,-100.124 cw(c-115.122,-100.422) -114.7,-100.422 ; v1@-114.824,-100.124 cw(c-115.122,-100.422) -114.7,-100.422 ; v1@-114.824,-100.124 cw(c-115.122,-100.422) -114.7,-100.422 ; v1@-114.824,-99.876 ccw(c-115.122,-99.578) -114.7,-99.578 ; v1@-114.824,-99.876 ccw(c-115.122,-99.578) -114.7,-99.578 ; v1@-114.824,-99.876 ccw(c-115.122,-99.578) -114.7,-99.578 ; v1@-114.824,-99.876 ccw(c-115.122,-99.578) -114.7,-99.578 ; -114.7,-100.422 cw(c-114.278,-100.422) v1@-114.576,-100.124 ; -114.7,-100.422 cw(c-114.278,-100.422) v1@-114.576,-100.124 ; -114.7,-100.422 cw(c-114.278,-100.422) v1@-114.576,-100.124 ; -114.7,-100.422 cw(c-114.278,-100.422) v1@-114.576,-100.124 ; -114.7,-99.578 ccw(c-114.278,-99.578) v1@-114.576,-99.876 ; -114.7,-99.578 ccw(c-114.278,-99.578) v1@-114.576,-99.876 ; -114.7,-99.578 ccw(c-114.278,-99.578) v1@-114.576,-99.876 ; -114.7,-99.578 ccw(c-114.278,-99.578) v1@-114.576,-99.876 ; -109.422,-88.8 cw(c-109.422,-89.222) v1@-109.124,-88.924 ; -109.422,-88.8 ccw(c-109.422,-88.378) v1@-109.124,-88.676 ; -109.422,-88.8 cw(c-109.422,-89.222) v1@-109.124,-88.924 ; -109.422,-88.8 ccw(c-109.422,-88.378) v1@-109.124,-88.676 ; -109.422,-88.8 cw(c-109.422,-89.222) v1@-109.124,-88.924 ; -109.422,-88.8 ccw(c-109.422,-88.378) v1@-109.124,-88.676 ; -109.422,-88.8 ccw(c-109.422,-88.378) v1@-109.124,-88.676 ; -109.422,-88.8 cw(c-109.422,-89.222) v1@-109.124,-88.924
EINT9: J1.77 RA3.1 | length 22.5
  Top Layer w0.15: J1.77@-106.841,-93.899 -106.216,-94.524 -104.276,-94.524 -104.073,-94.727 ; -104.243,-94.557 -104.073,-94.727 ; RA3.1@-98.48,-102.396 -99.804,-102.396 -100.1,-102.1 -100.1,-100.6 -101.8,-98.9 -101.8,-97 -104.073,-94.727 ; J1.77@-106.841,-94.107 cw(c-106.841,-94.529) -106.542,-94.231 ; J1.77@-106.841,-94.107 cw(c-106.841,-94.529) -106.542,-94.231 ; J1.77@-106.841,-94.107 cw(c-106.841,-94.529) -106.542,-94.231 ; J1.77@-106.666,-93.932 ccw(c-106.243,-93.932) -106.542,-94.231 ; J1.77@-106.666,-93.932 ccw(c-106.243,-93.932) -106.542,-94.231 ; J1.77@-106.666,-93.932 ccw(c-106.243,-93.932) -106.542,-94.231 ; -99.161,-102.396 cw(c-99.161,-102.819) RA3.1@-98.862,-102.52 ; -99.161,-102.396 ccw(c-99.161,-101.974) RA3.1@-98.862,-102.272 ; -99.161,-102.396 cw(c-99.161,-102.819) RA3.1@-98.862,-102.52 ; -99.161,-102.396 ccw(c-99.161,-101.974) RA3.1@-98.862,-102.272 ; -99.161,-102.396 cw(c-99.161,-102.819) RA3.1@-98.862,-102.52 ; -99.161,-102.396 ccw(c-99.161,-101.974) RA3.1@-98.862,-102.272 ; -99.161,-102.396 cw(c-99.161,-102.819) RA3.1@-98.862,-102.52 ; -99.161,-102.396 ccw(c-99.161,-101.974) RA3.1@-98.862,-102.272 ; -99.161,-102.396 ccw(c-99.161,-101.974) RA3.1@-98.862,-102.272 ; -99.161,-102.396 cw(c-99.161,-102.819) RA3.1@-98.862,-102.52 ; J1.77@-106.791,-94.224 cw(c-106.791,-94.888) -106.321,-94.419 ccw(c-106.791,-94.888) J1.77@-106.791,-94.224 ; J1.77@-106.616,-93.908 ccw(c-106.151,-93.931) -106.48,-94.26 cw(c-106.151,-93.931) J1.77@-106.616,-93.908 ; J1.77@-106.466,-93.915 ccw(c-105.695,-93.953) -106.241,-94.499 cw(c-105.695,-93.953) J1.77@-106.466,-93.915